# Altium PCB MB1137.PcbDoc (part 2 of 4)
Units mil, origin at the board's own origin, x right, y up, seen from the top; angles counter-clockwise.
Board outline 2760.94 x 5254.68 mil, 6 copper layers (Top Layer, GND, Signal, PWR, GND (Mid2), Bottom Layer), stack 74.545 mil thick; 293 components, 281 nets, 1134 pads, 921 vias.
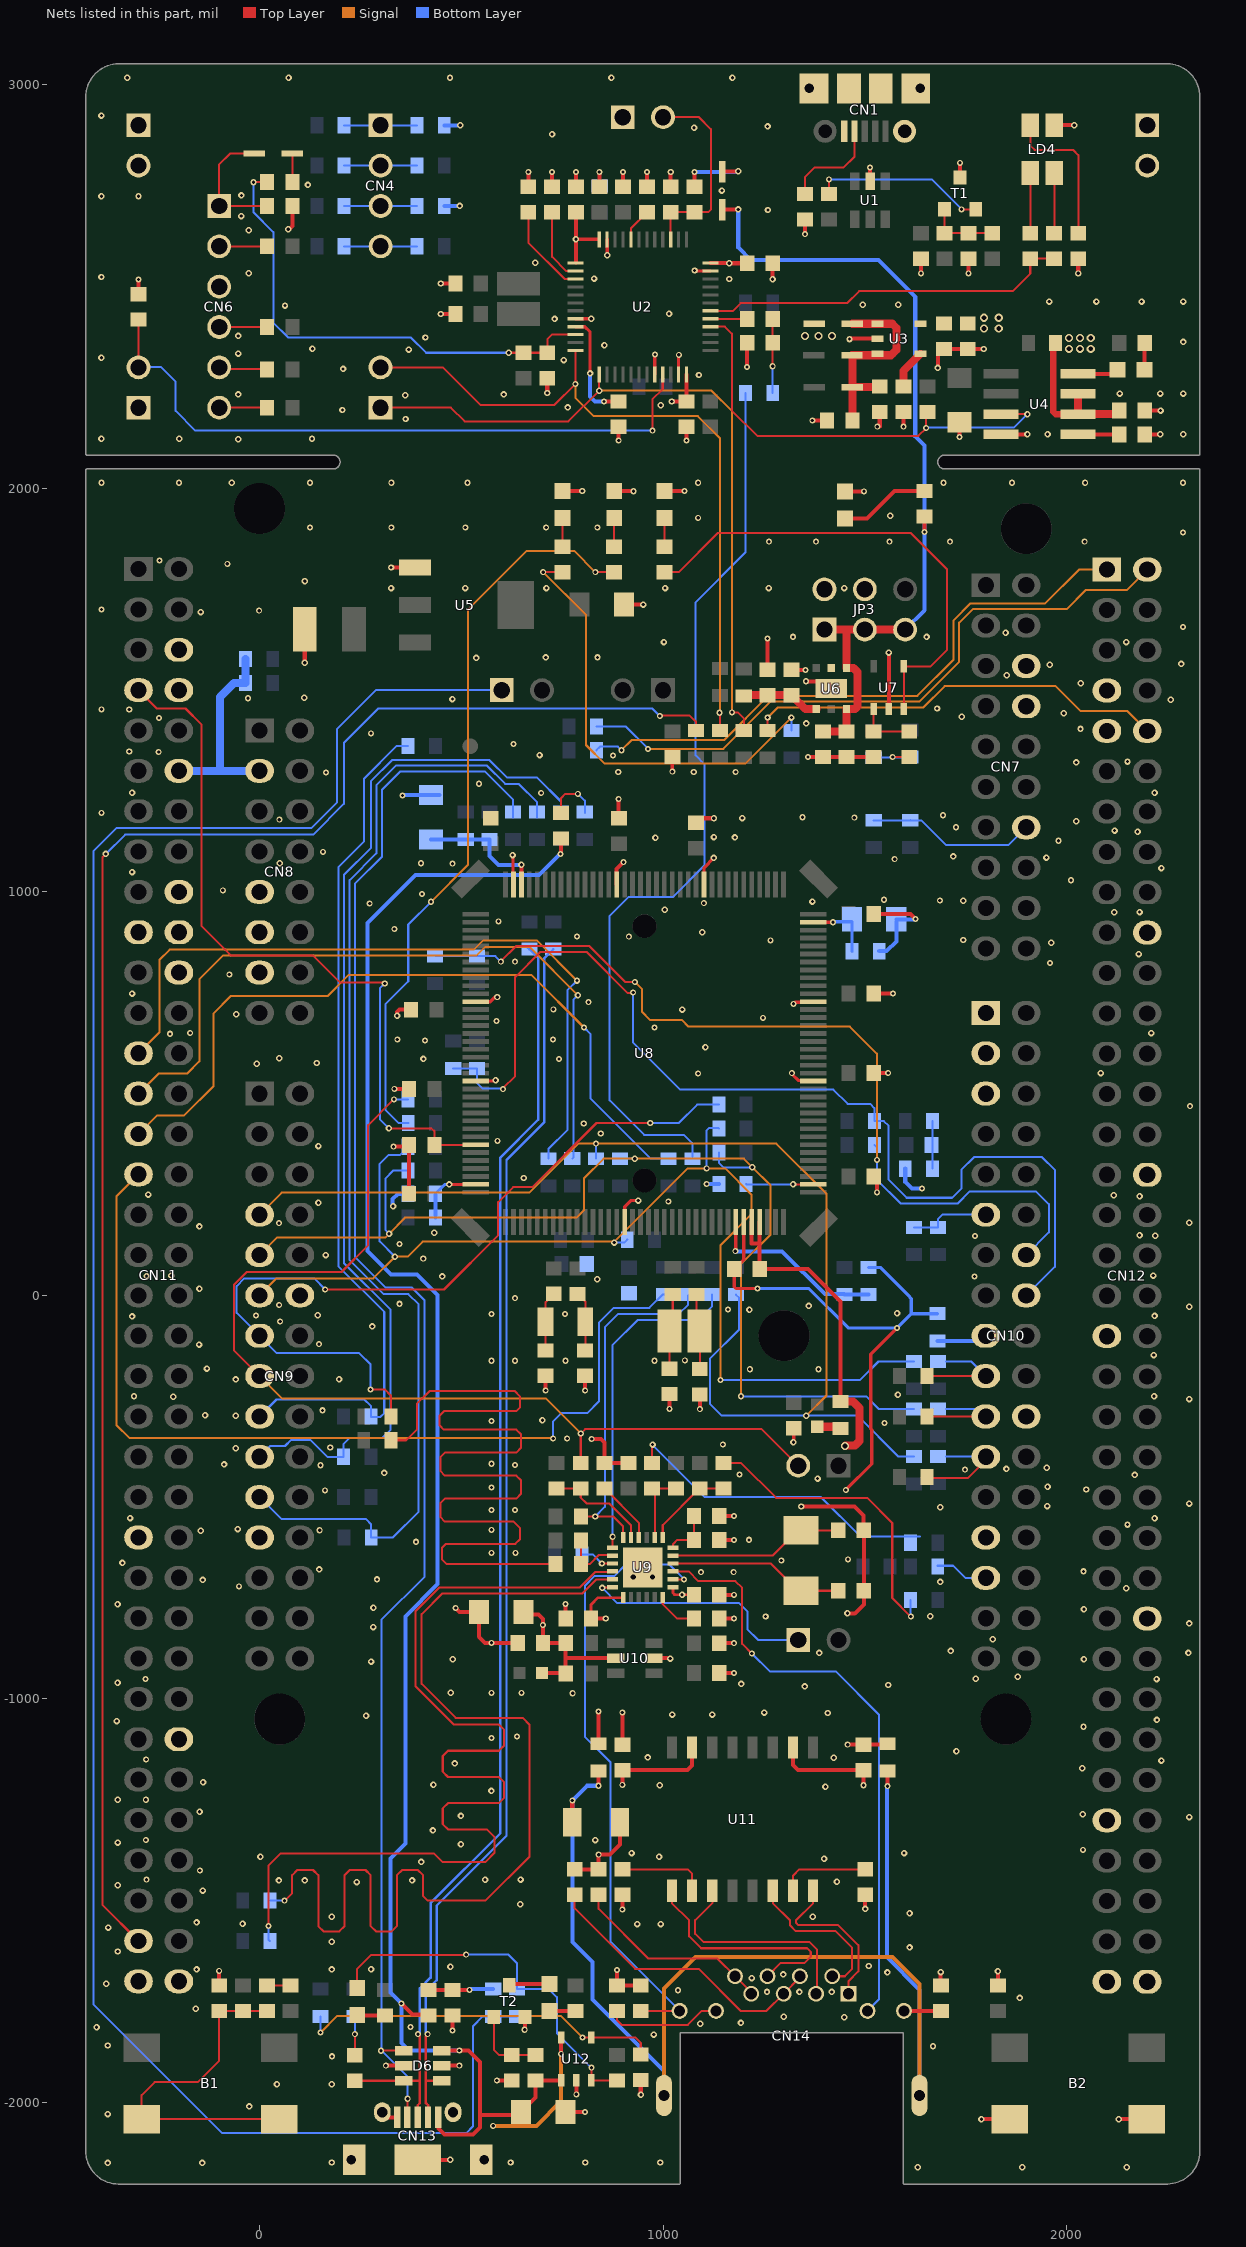
[diagram p6: the nets of this part, all layers, seen from the top]

## Via types
v1: diameter 16, hole 8, Top Layer to Bottom Layer, tented both sides, 464 vias
v2: diameter 15, hole 8, Top Layer to Bottom Layer, tented both sides, 415 vias
v3: diameter 20, hole 12, Top Layer to Bottom Layer, tented both sides, 39 vias
v4: diameter 25.98, hole 12.99, Top Layer to Bottom Layer, tented both sides, 2 vias
v5: diameter 15, hole 8, Top Layer to Bottom Layer, 1 vias

## Nets (pads, with @x,y where several pads share a name; then routed paths per layer and width w, separated by ;. In a path a pad name is that pad's centre, name@x,y a point inside that pad or via, vN(x,y) a via of type N, cw(c..) or ccw(c..) an arc to the next point about the centre after c; other vN are vias at no path point) (continued)
+3V3_ST_LINK: C1.2 C3.2 C8.2 C9.1 C12.2 C13.2 JP1.1 R5.2 R14.2 R18.1 SB102.2 T1.3 U2.1 U2.9 U2.24 U2.36 U2.48 U3.5 | length 878.3
  Top Layer w8: U2.9@782.68,2400.79 806.41,2400.79 819,2388.2 v1(819,2285) ; v1(784,2617.27) 784.06,2617.32 U2.48@841.73,2617.32
  Top Layer w10: R18.1@-300,2481.5 v2(-300,2518) ; U2.1@784,2559.53 v1(784,2617.27) C1.2@784,2684.45 ; R5.2@842,2747.5 v2(842,2784) ; v2(853.5,2215.5) C12.2@890,2215.5 ; v2(1021.5,2215.5) C13.2@1058,2215.5 ; C13.2@1058.27,2215.71 U2.24@1058.27,2282.68 ; U2.36@1117.32,2558.27 1208.24,2558.27 C3.2@1208.5,2558 v1@1170.27,2558 ; T1.3@1736,2770.37 v2(1736,2806.87) ; v2(2029,2533) R14.2@2029,2569.5
  Bottom Layer w10: SB102.2@457.75,2900 v1(497.25,2899.94) ; v1(819,2285) 818.73,2284.73 818.73,2227.76 831,2215.5 v2@852.21,2215.5
  other v1: 1015,2432.9 1495,2455 1583,2455 -27,2532.94 1164,2558 -27,2639.94
  other v3: 1795,2396 1832,2396 1795,2423 1832,2423
+5V: C22.2 C23.1 CN8.9 CN11.18 D2.1 JP3.1 JP3.3 JP3.5 R29.2 U6.1 U6.6 U12.5 | length 2424
  Top Layer w10: v2(747.6,-1879.54) U12.5@747.6,-1838.85 ; D2.1@1147,2690.76 v1@1185.61,2690.76 ; v2(1648,1892) R29.2@1648,1930.5
  Top Layer w20: C22.2@1396,1397.5 C23.1@1455,1397.5 U6.6@1455,1452.22 ; JP3.1@1400,1650 1454,1650 ; U6.6@1454.4,1452.82 1475.82,1452.82 1482,1459 1482,1545 1471.82,1555.18 U6.1@1454.4,1555.18 1454.4,1649.6 1454,1650 ; JP3.5@1600,1650 JP3.3@1500,1650 1454,1650
  Signal w10: v2@579,-2059 580,-2058 685.81,-2058 747.6,-1996.21 v2(747.6,-1879.54)
  Bottom Layer w10: v1(1186.37,2691.51) 1186.37,2596.63 1217,2566 1533.87,2566 1625,2474.87 1625,2129 1648,2106 v2(1648,1892) 1648,1698 JP3.5@1600,1650
  other v2: 579,-2058
AGND: C34.2 CN10.3 CN12.32 SB162.2 SB166.1 U8.31 | length 1362.7
  Top Layer w8: U8.31@1200.06,181.69 1200.06,88.56 C34.2@1176.5,65 1176.5,21.14 1180.53,17.11 1234.14,17.11 v2(1234.25,17) ; v2(1453,-482) 1517.21,-417.79 1517.21,-332.72 1514.7,-330.21 1514.7,-145.9 v2(1580,-80.6)
  Bottom Layer w8: v2(1234.25,17) 1361.59,17 1459.19,-80.6 v2(1580,-80.6) 1615.35,-45.25 ; SB166.1@1509,69.45 1538.55,69.45 1607.2,0.8 1607.2,0.28 1615.35,-7.87 1615.35,-45.25 ; SB162.2@1680,-45.25 1615.35,-45.25
AIN_1: R1.2 R24.2 R25.2 U2.10 | length 1219.8
  Top Layer w5: v1(-15,2759) R1.2@18.5,2759 ; v1(617.6,2336.2) R25.2@654,2336.2 R24.2@713,2336.2 713,2369.89 724.21,2381.1 U2.10@782.68,2381.1
  Bottom Layer w5: v1(-15,2759) -15,2684 34,2635 34,2411 71,2374 375,2374 412.8,2336.2 v1(617.6,2336.2)
AVDD: C34.1 CN7.6 CN10.1 CN12.7 SB12.2 U8.32 U8.33 | length 850.9
  Top Layer w10: U8.32@1219.75,181.69 1219.75,128.39 1239.43,128.39 ; U8.33@1239.43,181.69 1239.43,128.39 ; C34.1@1239.5,62 1239.43,62.07 1239.43,128.39 ; C34.1@1239.5,65 1359.74,65 1440,-15.26 SB12.2@1440,-262.8
  Top Layer w20: SB12.2@1440,-262.8 1470.8,-262.8 1487,-279 1487,-361.1 1476.1,-372 1452,-372 v3(1450.86,-373.14)
BOOT0: CN11.7 R36.1 U8.138 | length 1829.9
  Top Layer w5: CN11.7@-300,1500 -254.5,1454.5 -183.5,1454.5 -144,1415 -144,916.22 -69.81,842.03 132.97,842.03 200,775 310,775 v1(310,773) ; v1(320.57,414) 426,414 433.5,406.5 R36.1@433.5,373 ; R36.1@434,372.5 U8.138@534.57,372.5
  Bottom Layer w5: v1@310,775 v1(310,773) 298,761 298,436.57 v1(320.57,414)
E5V: CN11.6 D3.1 JP3.2
  other v3: 1352,2378 1385.5,2378 1419,2378
EGND: C51.1 CN14.13 CN14.14 SB16.1 SB17.1 | length 3067.5
  Top Layer w10: C51.1@774.94,-1306 774.94,-1252.06 v2(775,-1252) ; v2(840,-1215.25) SB16.1@840,-1178.75 ; v2(1556,-1216.25) SB17.1@1556,-1178.75
  Signal w10: CN14.14@1002.46,-1982.64 1002.46,-1717.54 1079.9,-1640.1 1569.1,-1640.1 1635.54,-1706.54 CN14.13@1635.54,-1982.64
  Bottom Layer w10: v2(840,-1215.25) 811.75,-1215.25 v2(775,-1252) 775,-1602 825,-1652 825,-1745.11 1002.46,-1922.57 CN14.14@1002.46,-1982.64 ; v2(1556,-1216.25) 1554.6,-1217.65 1554.6,-1640.06 1635.54,-1721 CN14.13@1635.54,-1982.64
GND: B2.1 B2.4 C1.1 C2.1 C3.1 C4.1 C5.2 C6.2 C7.2 C8.1 C9.2 C10.1 C11.1 C12.1 C13.1 C14.1 C15.1 C16.2 C17.2 C18.2 C19.1 C20.2 C21.2 C22.1 C23.2 C24.2 C25.2 C26.2 C27.2 C28.2 C29.2 C30.2 C31.2 C32.2 C33.2 C35.2 C36.2 C37.2 C38.2 C39.2 C40.1 C41.2 C42.1 C43.2 C44.1 C45.2 C46.2 C47.1 C48.1 C49.1 C50.1 C53.1 C54.2 C55.2 C56.2 C57.2 C58.2 CN1.5 CN1.6 CN1.7 CN1.8 CN1.9 CN1.10 CN2.1 CN2.2 CN3.1 CN3.2 CN6.3 CN7.8 CN8.11 CN8.13 CN9.12 CN9.23 CN10.5 CN10.17 CN10.22 CN10.27 CN11.8 CN11.19 CN11.20 CN11.22 CN11.49 CN11.60 CN11.71 CN11.72 CN12.9 CN12.20 CN12.39 CN12.54 CN12.63 CN12.71 CN12.72 CN13.5 CN13.6 CN13.7 CN13.8 CN13.9 CN13.10 D6.2 D6.5 JP2.1 LD1.2 LD2.2 LD3.2 LD4.1 LD6.2 R2.2 R3.1 R4.1 R6.1 R7.2 R11.2 R16.1 R24.1 R28.1 R33.2 R36.2 R41.2 R49.2 R58.2 R63.2 R65.2 R66.2 R67.2 R69.1 R72.1 SB16.2 SB17.2 SB106.2 SB107.1 SB129.2 SB152.2 SB153.2 SB155.2 SB162.1 T2.2 U1.2 U2.8 U2.20 U2.23 U2.35 U2.47 U3.2 U4.4 U5.1 U6.0 U6.2 U7.2 U8.16 U8.51 U8.61 U8.83 U8.94 U8.107 U8.120 U8.130 U9.25 U10.2 U12.2 | length 6241.3
  Top Layer w8: U8.130@535.69,531.1 v1@584.73,531.1 ; U8.120@535.69,727.95 572.04,727.95 583.08,739 v2(589,739) ; v1(627,1091.28) 627.98,1090.3 627.98,1019.52 U8.107@629.2,1018.31 ; U2.8@782.68,2420.47 v1(822.18,2420.41) v1(822.18,2420.41) ; v1(861.42,2577.76) U2.47@861.42,2617.32 ; U8.16@904.79,181.69 904.79,219.79 920,235 v1(938.42,235) ; U2.20@979.53,2282.68 v2@979.53,2331.53 ; v2(1023,1298) C21.2@1023,1334.5 C21.2@1030,1327.51 ; U2.23@1038.58,2282.68 v2@1038.58,2330.58 ; v1(1078,2540) 1079.42,2538.58 U2.35@1117.32,2538.58 ; U8.83@1101.64,1018.31 1101.64,1060.14 v1(1125.75,1084.25) ; v2(1319,550.79) 1319,548.74 1334.86,532.88 1370.53,532.88 U8.51@1372.31,531.1 ; v1(1323,-364) 1324,-363 C39.2@1324,-328.9 ; v2(1323.54,722.64) 1327.41,726.5 U8.61@1370.85,726.5
  Top Layer w10: R58.2@-100,-1710.5 v2(-100,-1674) ; v1@73,2642 81.5,2650.5 R2.2@81.5,2700 ; v1(111.98,1567.98) C17.2@111.98,1651 ; CN13.6@304.4,-2024.2 317.2,-2037 CN13.5@340.82,-2037 ; v2@314,-1909 D6.2@356.76,-1909 ; v1@324,1804 v1(326,1804) U5.1@385,1804 ; v2(331.75,368.5) R36.2@368.25,368.5 ; v2(334,512) C30.2@370.5,512 ; v1(340.82,693) 340.82,701.82 347,708 C28.2@375.5,708 ; C33.2@370.5,252 R36.2@370.5,373 ; CN13.8@392,-2142.31 v1(472.32,-2142.31) ; v2(449,2432) C6.2@485.5,2432 ; v2(449,2508) C5.2@485.5,2508 ; D6.5@451.24,-1909 v2@494,-1909 ; v2(478,-1822) R63.2@478,-1784.5 ; v2(486,-775) 496,-785 C46.2@544,-785 544,-846 559,-861 v2(575,-861) C48.1@639.5,-861 ; v2(588,-1945.55) 588.05,-1945.5 R69.1@625,-1945.5 ; v2(657,-1820) 657.59,-1819.41 T2.2@657.59,-1788.37 ; R3.1@666,2747.5 v2(666,2784) ; v2(709,-236) C35.2@709,-199.5 ; v2(713,2236.7) R24.1@713,2273.2 ; R4.1@725,2747.5 v2(725,2784) ; LD3.2@752.75,1993.46 v2(799.75,1993.43) ; C54.2@758,-2024 v2(806.36,-2024) ; C47.1@758.5,-801 v2(758.5,-764.5) ; C1.1@784,2747.5 v2(784,2784) ; v2(785,-1980) U12.2@785,-1945.15 ; v2(807,-236) C36.2@807,-199.5 ; v2(823,-356) 846,-356 855,-365 R41.2@855,-415.5 C40.1@914,-415.5 ; SB16.2@840,-1111.25 v2(840,-1031.25) ; LD2.2@879.76,1993 v2@926.73,1993 ; U8.94@885.1,1018.31 885.1,1056.69 v2(902,1073.58) ; v2(886,-1672) R65.2@886,-1710.5 R66.2@944.68,-1710.5 ; C25.2@890,1185 v2(890,1230) ; v2(890,2119) C12.1@890,2152.5 ; C49.1@899,-1113.5 v2(899,-1033.5) ; C2.1@901,2747.5 v2(901,2784) ; C18.2@903,1712 v1(951,1712) ; R72.1@944.68,-1944.5 944.68,-1980.68 v1(945,-1981) ; R6.1@960,2747.5 v2(960,2784) ; U10.2@977.56,-899 1018.06,-899 1018,-899.06 v1(1018,-900) ; LD1.2@1006,1993.47 v2@1052.97,1993.47 ; v2(1016,-281) C37.2@1016,-244.5 ; R7.2@1019,2747.5 v2(1019,2784) ; v2(1058,2119) C13.1@1058,2152.5 ; C26.2@1082,1182.5 v2(1125.75,1182.5) ; v2(1091,-282) C38.2@1091,-245.5 ; R49.2@1139.5,-801 v2(1176,-801) ; C44.1@1139.5,-742 v2(1176,-742) ; C42.1@1139.5,-606 v2(1176,-606) ; C41.2@1139.5,-547 v2(1176,-547) ; v2(1208,2301) 1208.5,2301.5 C7.2@1208.5,2361 ; C19.1@1259,1550.5 v2(1259,1628.07) ; v1(1271.5,2518.5) C3.1@1271.5,2558 ; C20.2@1318,1550.5 v2@1354.5,1550.5 ; v1(1342.7,-523.21) 1474.51,-523.21 1497,-545.7 1497,-581.5 C43.2@1497.5,-582 ; v2(1352,2630) R11.2@1352,2666.5 ; v2(1354.5,1522) U6.0@1391,1522 ; v2(1359.5,1334.5) C22.1@1396,1334.5 R33.2@1522,1334.5 ; v2(1370,2168) C10.1@1406.5,2168 ; LD6.2@1451.04,1992.79 v2(1498.04,1992.77) ; v2(1457.5,-1113.5) C50.1@1497,-1113.5 SB17.2@1553.75,-1113.5 ; v1@1459.55,-788 1475.1,-788 1497.5,-765.6 C45.2@1497.5,-732 C43.2@1497.5,-582 ; v1@1462,2371 U3.2@1531.85,2371 ; C43.2@1497,-582.5 C43.2@1497.5,-582 ; U1.2@1513,2761.24 v2(1513,2795) ; C31.2@1522.5,551 v2(1558,551) ; C29.2@1522.5,748 v2(1570,748) ; C27.2@1522.5,945 1613.75,945 v2(1625.75,933) ; C32.2@1523.5,296 C32.2@1522.5,295 1530,287.5 v2(1530,255.51) ; v2(1531,2153) 1537,2153 C14.1@1537,2189.5 ; U7.2@1559.5,1452.85 v1(1559.5,1593) ; v2(1596,2153) C15.1@1596,2189.5 ; v2(1639,2533) C4.1@1639,2569.5 ; v1(1681,2298.5) C8.1@1681,2338 ; R67.2@1688,-1710.5 v1(1688,-1677) ; C8.1@1696,2345.5 C9.2@1755,2345.5 v1(1794.5,2345.5) ; v2(1735,2127.5) C16.2@1735,2164 ; v2(1756.7,2533) R16.1@1756.7,2569.5 ; v1(1788.87,-2041.58) B2.1@1858.72,-2041.58 ; C53.1@1830,-1710.5 v1(1830,-1675) ; U4.4@1837.53,2134 v1(1903,2134) ; LD4.1@1969.53,2900.06 v1(2018.94,2900.06) ; v1(2129.42,-2041.58) B2.4@2199.28,-2041.58 ; R28.1@2193.5,2134 v1(2232,2134) ; C11.1@2193.5,2193 v1(2233,2193)
  Bottom Layer w10: v1(331,221) 330,221 330,239.36 342.46,251.83 SB153.2@368.19,251.83 ; v2(354,1239) 355,1240 C55.2@425,1240 C55.2@446,1240 ; SB106.2@457.75,2700 v1(496,2700) ; v2(1108,276.3) 1108.3,276 SB155.2@1138.25,276 ; SB129.2@1535.75,853 1554.3,853 1578.5,877.2 C56.2@1578.5,926 ; C56.2@1578,932 1624.75,932 v2(1625.75,933) ; SB152.2@1600.25,314 1600.25,280.75 1616.46,264.54 1641.54,264.54 v2(1642,265) ; SB162.1@1680,-112.75 1787.25,-112.75 CN10.17@1800,-100
  other v1: 1631.03,-2161 1890,-2161 2148.97,-2161 -376.5,-2150 -142.25,-2150 179,-2149 622,-2149 807.21,-2149 993,-2149 -376.5,-2029 -25.75,-2010.04 43,-1955.06 179,-1955.06 179.47,-1886 1669,-1861 -376.5,-1859 977,-1832 -404,-1814 1092,-1805 1193,-1803 1448.82,-1789 1299.1,-1788 -157.97,-1768 1884,-1741 1257.62,-1726.17 1337.94,-1726.17 1418.25,-1726.17 1037,-1722 -380,-1706 1219.75,-1691.86 1297.78,-1682.87 1556,-1678 -156,-1670.5 179,-1670.5 276.5,-1670 473,-1664 1510,-1662 -351.37,-1626 1610.94,-1615.79 179,-1602 -375,-1566.79 936,-1558 994,-1558 -42,-1557 -156,-1554 179,-1540 1371,-1540 1611,-1531 646,-1509 -141,-1475 -351.37,-1462 241,-1454 1431,-1453 48,-1450 112,-1450 378,-1450 559,-1448 647,-1447.71 400.5,-1404 1399,-1396 2,-1391 990,-1391 922,-1382 1597.26,-1382 499,-1360 -351.37,-1356 832,-1350 429.52,-1326 2304,-1292.86 499,-1290 2040,-1286 -148.74,-1279.7 -351.37,-1250 574.5,-1228 1402.35,-1218 991.76,-1214 430.77,-1212.62 -140,-1206.5 2039,-1172 484,-1160 2235,-1153 1423,-1146 962,-1145 1727,-1130 2042,-1069 -354,-1055 2224,-1052 264,-1042 1022.9,-1039 1122,-1039 1408,-1035 1251,-1034 474,-984.5 1351,-969 1558,-965.53 1194,-963 -352,-960 2223,-951 1775,-950.06 1879,-945 276.5,-907.39 479,-902 2043,-902 1387,-886 2302,-886 1713,-881 1817,-852 282,-822 2304,-813 1254,-795.84 1662,-795.34 1457,-788 2043,-778 282.11,-774 -352,-765.17 2147.65,-726 1687,-710 -141,-705 291,-703.84 2042.03,-684 148.13,-679 -340,-663 387.74,-611 1213,-606 -146,-583 -54,-579 2151,-568 -320.97,-552 2218.02,-552.5 1687,-525 1952,-522 2304,-515.94 2049,-481 1953,-474 1383,-454 2169,-445 309,-440 1851,-430 1951,-427 151,-421 -88,-419 -59,-379 175,-377 701,-309.5 -59,-298 -135,-297 156,-285 2304,-256.97 -214,-251 2217,-250 1582,-246 -59,-208.17 197,-208 -130.5,-181.5 2216,-148 -150,-122 279.5,-77 -316,-52 2218,-51 144,-49 1580,-44 1214,-35.76 2304,-28 1361,-26 346.79,-21 -149,16.3 837,40 453,47 -280,48 -219,49 2215,49.25 163.77,100 2220.03,148 2181,149 433,155.5 -149,171 2304,180 146,229.8 2181,246 2117,248 -276,250 655,291 146,370 585,533 2085,551 -7,574 142,576 406,586 48.5,588 1104.94,615 -222,648 2210,650 -58,697 1047.34,708.45 -316,748 2179,846 1097,900 2118,949.45 2181,950 1004,956.01 1370.05,976.02 1743.93,978 2011,1029 -316,1049.07 2235,1059 1950,1085 1719,1088 1980,1127 981,1134 1178,1135 1126,1136 2176,1149 2119,1152 1726,1160 2024,1175 1196,1183 -316,1246 2218,1246 2024,1321 2151,1323 693.93,1339.01 -323,1348 2034.5,1404 1355,1417.57 1740,1434 1993,1443 -323,1452 1679,1454.5 2258,1476 478,1478 -28.66,1480 111,1481 2035,1517.25 1852,1537 1958.25,1563 2284,1565 537,1580 709,1581 837.5,1581 1002,1619 2148,1619 1322,1632 1653,1632 1849,1642.49 -146,1693.35 326,1753 509.5,1753 710.81,1753 1005,1753 1262,1753 1449,1753 112.48,1770 1563.22,1932 -53,2122 -392,2123 -199,2123 1953,2134 2289,2134 362,2172 205.24,2194.26 763.56,2200.71 994.54,2206 361,2231 -53,2232.94 605,2232.94 2132,2235 2232,2235 2289,2235 1089,2281 207,2296 754,2318 -392,2323.94 -53,2334 370,2344 131,2346 854.71,2355 2289,2363 1462,2370 411,2374 -53,2377.94 731,2420 63,2453 1957.34,2463 2074,2463 2186,2463 2289,2463 1164,2519 829,2520 -392,2523.94 683,2559 71,2642 -45.56,2675 1260,2690 -392,2723.94 -300,2723.94 -45.07,2726 1146,2738 119.84,2752 725,2877.94 1077,2894 1259,2897 -392,2924 -328,3018 72,3018 472,3018 872,3018 1172,3018
  other v2: 313,-1909 495,-1909 374,-1813 -280,-1448 -148,-1425 2041,-1374 -282,-1350 -282,-1250 -281,-1150 574.5,-1097 638,-1093.17 776,-986 575,-985 649,-985 -283,-951 -51,-721 1094,-686 1175,-686 1293,-657 1458,-654 575,-638 634,-638 149,-582 575,-581 575,-532 633,-532 162,-483 575,-476.02 1189.2,-444 1748,-432 633,-420 575,-417.24 1148,-369.63 762.42,-354.5 1549,-316 575,-311 -311,-250 1215,-183 1385,-183 575,-162 633,-162 758,-162 979,-162 1054,-161 147,-121 51,-65 -9,-49.94 575,-46 757,-46 1161,-35 48.5,-24 633,-7 1772,47 405.67,91 347,127.43 1773,147 48,179 1013,232.5 590,383 845.5,401 803.45,426 2306,469 1087,549.94 742,585.69 410,632 341.32,634 727,634 -172,650 979,664 587,680 1248,688 728,709 815,726.64 -75,795 1959.06,824 633,827 1962,874 1266.25,880 1744,881 915.13,889 787,889.43 334,908 592,927 272.84,971 1101,972 1685.99,978.54 1547.5,980.5 402.69,995 -91,1004 478,1070 50,1071 400,1071 1574,1081 157,1099.36 49,1179 1473.99,1184 1345.31,1185 1693.59,1190 -391.5,1196 698,1245 544,1268 164.5,1296 889,1297 1076,1297 1180,1297 876,1338 -250,1347 629,1366.25 276,1393 -249,1431 -391.5,1452.5 1353,1550 2288.5,1656.82 -1,1697 -391.5,1700 111.98,1770.5 -80,1813 -248,1821 1262.5,1868 1379,1868 1561,1868 1711,1868 2045,1868 2288.5,1891 125,1903 326.5,1903 510,1903 710.31,1903 837,1903 1087,1927 926.76,1992.97 1053,1993.44 -391.5,2014 -199.5,2014 -69,2014 125,2014 326.5,2014 515.21,2014 1087,2014 1695,2014 1864.59,2014 2046.18,2014 2288.5,2014 130,2123 1039,2331 980,2332
  other v4: 926.38,-697.94 973.62,-697.94
IOREF: CN8.3 CN11.12 SB113.2 SB114.2 | length 520.2
  Bottom Layer w20: CN11.12@-200,1300 -97,1300 ; SB113.2@-34.75,1577 SB114.2@-34.75,1518 -63,1518 -98,1483 -98,1301 -97,1300 ; CN8.3@0,1300 -97,1300
LED_STLINK: R13.1 R17.1 U2.30 | length 927.5
  Top Layer w5: U2.30@1117.32,2440.16 1117.98,2439.5 1172.92,2439.5 1192.42,2459 1455.91,2459 1485.91,2489 1866.5,2489 1910,2532.5 R13.1@1910,2569.5 R17.1@1969,2569.5
MCO: SB112.2 SB149.1 | length 2262.1
  Bottom Layer w5: SB149.1@1072.7,338.75 1072.7,377.09 1051.79,398 953,398 867.73,483.27 867.73,940.73 914,987 1024.1,987 1102.45,1065.35 1102.45,1316.21 1080.49,1338.17 1080.49,1717.49 1204.25,1841.25 SB112.2@1204.25,2236
NetB1_1: B1.1 B1.4 C52.2 R58.1 R59.1 | length 869
  Top Layer w5: C52.2@18,-1773.5 R59.1@-41,-1773.5 R58.1@-100,-1773.5 -100,-1897 -153,-1950 -260,-1950 -292.28,-1982.28 B1.1@-292.28,-2041.58 B1.4@48.28,-2041.58
NetC7_1: C7.1 R20.2 SB112.1 | length 184.1
  Top Layer w5: R20.2@1271.5,2420 C7.1@1271.5,2361 1271.5,2302.99 v2(1271.75,2302.73)
  Bottom Layer w5: SB112.1@1271.75,2236 v2(1271.75,2302.73)
NetC10_2: C10.2 C14.2 D3.2 D4.2 D5.2 U3.1 U3.3 | length 510.4
  Top Layer w20: D4.2@1468.24,2330 1565,2330 1568.6,2333.6 1578,2343 1578,2398 1568,2408 D3.2@1469.24,2408 ; D4.2@1469.24,2329 D5.2@1469.24,2251 ; C10.2@1469.5,2168 1469.24,2168.25 D5.2@1469.24,2251 ; C14.2@1535.5,2251 D5.2@1469.24,2251
NetC11_2: C11.2 JP3.4 SB1.2 U4.6 U4.7 | length 388.2
  Top Layer w16: SB1.2@1972.75,2360 1967.17,2354.42 1967.17,2189.83 1973,2184 U4.6@2028.47,2184
  Top Layer w20: U4.7@2028.47,2234 U4.6@2028.47,2184 C11.2@2130.5,2184
  other v3: 2006,2346 2033,2346 2060,2346 2006,2373 2033,2373 2060,2373
NetC15_2: C15.2 U3.4 | length 98.6
  Top Layer w20: C15.2@1596,2252.5 1596,2291.45 U3.4@1638.15,2333.6
NetC19_2: C19.2 C20.1 SB3.1 U6.4 | length 194.9
  Top Layer w20: SB3.1@1200,1485.25 1202.25,1487.5 C19.2@1259,1487.5 C20.1@1318,1487.5 1352.69,1452.82 U6.4@1379.6,1452.82
NetC35_1: C35.1 R37.1 X2.2 | length 148.4
  Top Layer w5: C35.1@708.79,-136.29 X2.2@708.79,-65 708.79,-16.46 R37.1@729,3.75
NetC36_1: C36.1 R38.1 X2.1 | length 147.8
  Top Layer w5: R38.1@788,3.5 807.21,-15.71 X2.1@807.21,-65 C36.1@807.21,-136.29
NetC37_1: C37.1 SB8.1 X3.2 | length 186.8
  Top Layer w5: X3.2@1015.6,-88 1024,-79.6 SB8.1@1024,2.25 ; C37.1@1016,-181.5 X3.2@1016,-88.4
NetC38_1: C38.1 SB9.1 X3.1 | length 187.2
  Top Layer w5: SB9.1@1083,2.25 1083,-80.6 X3.1@1090.4,-88 ; C38.1@1091,-182.5 X3.1@1091,-88.6
NetC41_1: C41.1 C42.2 U9.6 | length 123.8
  Top Layer w5: U9.6@1024.8,-625.1 1024.8,-616.2 1035,-606 C42.2@1076.5,-606 C41.1@1076.5,-547
NetC43_1: C43.1 U9.5 X4.1 | length 426.7
  Top Layer w5: U9.5@1024.8,-644.79 1271.21,-644.79 1333.8,-582.2 X4.1@1342,-582.2 1425.31,-582.2 C43.1@1425.5,-582
NetC44_2: C44.2 C46.1 C47.2 C48.2 C49.2 C50.2 L2.1 R50.2 R51.2 R52.2 R53.2 U9.1 U9.19 U10.5 U11.2 U11.7 | length 1232.3
  Top Layer w7: C47.2@821.5,-801 821.5,-766.5 838.88,-749.12 U9.19@900.79,-749.12 ; U9.1@1024.8,-723.53 1024.8,-737.8 1029,-742 v1(1047,-742) C44.2@1076.5,-742
  Top Layer w10: C46.1@654,-791 691,-791 702.5,-802.5 C48.2@702.5,-861 R52.2@758.5,-861 758.5,-898 ; L2.1@699.5,-936 R53.2@757.5,-936 ; R53.2@758.5,-937 758.5,-898 ; C47.2@821.5,-801 v2(858,-801) ; U10.5@883.07,-899 759.5,-899 758.5,-898 ; v2(899,-1213) C49.2@899,-1176.5 ; C49.2@912,-1176.5 1060.98,-1176.5 1072,-1165.47 U11.7@1072,-1120.44 ; R51.2@1139.5,-936 v2(1176,-936) ; R50.2@1139.5,-862 v2(1176,-862) ; U11.2@1322,-1120.44 1322,-1164 1334.5,-1176.5 C50.2@1497,-1176.5 v2(1497,-1214)
  other v2: 702,-817
NetC45_1: C45.1 U9.4 X4.2 | length 451.9
  Top Layer w5: U9.4@1024.8,-664.47 1267.21,-664.47 1334.54,-731.8 X4.2@1342,-731.8 ; X4.2@1324.8,-731.8 1333,-731.8 1333.2,-732 C45.1@1431.55,-732
NetC51_2: C51.2 R54.1 R55.1 R56.1 R57.1 | length 285.4
  Top Layer w10: R54.1@781,-1422.5 R55.1@840.33,-1422.5 v2(840.33,-1386) 868.07,-1386 893.06,-1361.02 C51.2@893.06,-1306 ; v2(899,-1522) R56.1@899,-1485.5 ; v1(1501,-1520.5) R57.1@1501,-1485.5
NetC52_1: C52.1 R60.2 | length 59
  Top Layer w5: C52.1@18,-1710.5 R60.2@77,-1710.5
NetC54_1: C54.1 CN13.1 D6.6 R35.1 R62.1 R68.1 U12.1 | length 4440.2
  Top Layer w10: v2(351.25,-1755) 378.91,-1782.66 417.16,-1782.66 R62.1@419,-1784.5 ; CN13.1@443.18,-2037 443.18,-2064.18 458.4,-2079.4 529,-2079.4 546,-2062.4 546,-2031 ; D6.6@451.24,-1871.6 v2(495,-1871.6) 517.6,-1871.6 546,-1900 546,-2031 ; v2(746.14,1094) 747,1094.86 R35.1@747,1132.5 ; U12.1@747.6,-1945.15 747.25,-1945.5 R68.1@684,-1945.5 684,-1988 C54.1@648,-2024 641,-2031 546,-2031
  Bottom Layer w10: v2(495,-1871.6) 369.85,-1871.6 351.25,-1853 v2(351.25,-1755) 324.1,-1727.85 324.1,-1395.9 361.5,-1358.5 361.5,-795.27 441.5,-715.27 441.5,0.75 390.08,52.17 325.46,52.17 267.4,110.23 267.4,923.4 386,1042 692.02,1042 744.02,1094 v2(746.14,1094)
NetC55_1: C55.1 SB123.1 SB124.1 U8.106 | length 323.1
  Top Layer w10: U8.106@648.88,1018.31 v1(648.88,1067.12)
  Bottom Layer w10: C55.1@425,1130 510.75,1130 SB123.1@511,1130.25 SB124.1@570,1130.25 570,1089 591.88,1067.12 v1(648.88,1067.12)
NetC56_1: C56.1 SB129.1 U8.71 | length 169.8
  Top Layer w8: U8.71@1372.31,924.8 v2(1420.9,924.8)
  Bottom Layer w8: v2(1420.9,924.8) 1422.09,926 1468.5,926 1468.5,853.25 SB129.1@1468.25,853
NetCN1_4: CN1.4 R11.1 | length 248.4
  Top Layer w5: R11.1@1352,2729.5 1352,2771.94 1375.06,2795 1447,2795 1474.41,2822.41 CN1.4@1474.41,2885
NetCN4_1: CN4.1 SB101.2 SB102.1 | length 180.5
  Bottom Layer w5: SB101.2@209.75,2900 CN4.1@300,2900 SB102.1@390.25,2900
NetCN4_2: CN4.2 SB103.2 SB104.1 | length 180.5
  Bottom Layer w5: SB103.2@209.75,2800 SB104.1@390.25,2800
NetCN4_3: CN4.3 SB105.2 SB106.1 | length 180.5
  Bottom Layer w5: SB105.2@209.75,2700 CN4.3@300,2700 SB106.1@390.25,2700
NetCN4_4: CN4.4 SB108.2 SB109.1 | length 180.5
  Bottom Layer w5: SB108.2@209.75,2600 CN4.4@300,2600 SB109.1@390.25,2600
NetCN5_1: CN5.1 SB5.1 U2.13 | length 1790
  Top Layer w5: CN5.1@299.69,2200 474,2200 508,2166 765.46,2166 v1(841.73,2242.27) U2.13@841.73,2282.68 ; v2(1171,1445) 1185,1445 1200,1430 SB5.1@1200,1400
  Signal w5: v1(841.73,2242.27) 1120,2242.27 1171,2191.27 v2(1171,1445)
NetCN5_2: CN5.2 SB6.1 U2.12 | length 1784.1
  Top Layer w5: CN5.2@299.69,2300 454,2300 547,2207 731,2207 v2(782.5,2258.5) 782.68,2258.68 U2.12@782.68,2341.73 ; SB6.1@1141,1400 v2@1141,1443.93
  Signal w5: v2(782.5,2258.5) 782.5,2224.5 828,2179 1086,2179 1141.07,2123.93 v2@1141.07,1444
  other v2: 1140,1444
NetCN6_1: CN6.1 D1.1 R2.1 | length 320.4
  Top Layer w5: D1.1@-12.24,2829.94 -73,2829.94 -100,2802.94 CN6.1@-100,2700 R2.1@18.5,2700
NetCN6_2: CN6.2 R10.1 | length 117
  Top Layer w5: CN6.2@-100,2600 R10.1@17,2600
NetCN6_4: CN6.4 R19.1 | length 116.4
  Top Layer w5: CN6.4@-100,2400 15,2400 R19.1@16,2401
NetCN6_5: CN6.5 R22.1 | length 118.4
  Top Layer w5: CN6.5@-100,2300 -95.5,2295.44 R22.1@16.56,2295.44
NetCN6_6: CN6.6 R23.1 | length 120
  Top Layer w5: CN6.6@-100,2200 19.94,2199.94 R23.1@20,2200
NetCN7_14: CN7.14 SB121.1 SB122.1 | length 421.8
  Bottom Layer w5: SB121.1@1522,1177.5 SB122.1@1612.75,1177.5 ; SB122.1@1613.15,1177.9 SB122.1@1612.75,1177.5 ; CN7.14@1900,1160 1856.51,1116.51 1700.72,1116.51 1639.72,1177.5 SB122.1@1612.75,1177.5
NetCN9_7: CN9.7 SB146.1 SB165.1 SB174.1 | length 3002.9
  Signal w5: CN9.7@0,200 54.5,254.5 668.5,254.5 790,376 v2(834,376) 1281,376 1405,252 1405,-248 v1(1355,-298)
  Bottom Layer w5: SB146.1@834,338.75 834,374.94 835.06,376 v2(834,376) ; SB165.1@1180.53,2.06 1188.49,-5.9 1188.49,-84.53 1116,-157.02 1116,-268.53 1145.47,-298 v1(1355,-298) 1482,-298 1583.5,-399.5 SB174.1@1622,-399.5
NetCN9_9: CN9.9 SB143.1 SB147.1 SB150.1 SB171.1 | length 2788.9
  Signal w5: CN9.9@0,100 42.97,142.97 310.97,142.97 v1(321,153) 361,193 786,193 804,211 804,290 852.75,338.75 v1(929.75,338.75) 1199.99,338.75 v1(1221.25,317.49) 1266.25,272.49 1266.25,150.61 1193,77.36 v2(1193,-250)
  Bottom Layer w5: v1(321,153) 311.6,162.4 311.6,289.6 331.5,309.5 SB143.1@368.25,309.5 ; SB147.1@893,338.75 v1(929.75,338.75) ; SB150.1@1138.25,354 1138.25,328.5 1149.26,317.49 v1(1221.25,317.49) ; v2(1193,-250) 1503.2,-250 1534.7,-281.5 SB171.1@1622,-281.5
NetCN9_11: CN9.11 SB138.1 SB140.1 SB157.1 SB167.1 | length 2863.1
  Signal w5: CN9.11@0,0 42.03,42.03 281.78,42.03 v1(335.56,95.81) 366.81,95.81 404,133 879,133 1061,315 v2(1108,315) 1154,315 1219,250 1219,200.63 1142.1,123.73 v2(1142.1,-209.8)
  Bottom Layer w5: v1(335.56,95.81) 297.7,133.67 297.7,325.95 320.25,348.5 348.25,348.5 SB138.1@368.25,368.5 ; v1(879,131) 904.25,131 SB157.1@911.25,138 ; v2(1108,315) 1108,409 1114,415 1137.25,415 SB140.1@1138.25,414 ; v2(1142.1,-209.8) 1487.95,-209.8 1534,-163.75 SB167.1@1621.75,-163.75
NetCN9_13: CN9.13 SB11.1 SB137.1 | length 2074
  Top Layer w5: v2(162.7,14.7) 457.06,14.7 591.11,148.75 591.11,231.11 628.5,268.5 676.3,268.5 835.06,427.26 v1(968,427.26) ; v2(275,-233) 310,-233 325.75,-248.75 SB11.1@325.75,-299.97
  Bottom Layer w5: v2(162.7,14.7) 135.37,42.03 -37.97,42.03 -57,23 -57,-43 CN9.13@0,-100 42.97,-142.97 246.97,-142.97 275,-171 v2(275,-233) ; v1(968,427.26) 1039,427.26 1084.74,473 SB137.1@1138.25,473
NetCN9_15: CN9.15 JP6.2 R40.2 SB136.1 | length 2558.3
  Top Layer w5: CN9.15@0,-200 -63,-137 -63,27 -32.03,57.97 202.97,57.97 269.13,124.13 269.13,422.08 v2(333,485.95) ; R40.2@796.01,-415.5 v2(796.01,-342.01) 806.72,-331.3 1244.3,-331.3 JP6.2@1335,-422
  Signal w5: CN9.15@0,-200 56,-256 710,-256 v2(796.01,-342.01)
  Bottom Layer w5: v2(333,485.95) v2(333,485.95) SB136.1@368.25,486
NetCN9_17: CN9.17 SB115.1 SB169.1 | length 2152.3
  Bottom Layer w5: CN9.17@0,-300 42.03,-257.97 117.41,-257.97 ; 117.44,-258 259.84,-258 275.75,-273.91 SB169.1@275.75,-300 276.75,-301 299.69,-301 309,-291.69 309,-40.97 195.4,72.63 195.4,1061.4 259,1125 259,1281 340,1362 SB115.1@368.25,1362
NetCN9_19: CN9.19 SB128.1 SB170.1 | length 2663.5
  Bottom Layer w5: CN9.19@0,-400 26.79,-373.21 63,-373.21 78.24,-357.97 126,-357.97 168.03,-400 SB170.1@208.25,-400 208.25,-367.75 223.18,-352.82 304.68,-352.82 325,-332.5 325,-35.76 209.3,79.94 209.3,1042.3 275.7,1108.7 275.7,1274.17 328.43,1326.9 569.42,1326.9 613.32,1283 688,1283 747,1224 SB128.1@747,1197.75 SB128.1@747,1185
NetCN9_21: CN9.21 SB126.1 SB176.1 | length 2908.7
  Bottom Layer w5: CN9.21@0,-500 54,-554 263,-554 276.75,-567.75 SB176.1@276.75,-600 330,-600 394,-536 394,-22 369,3 307.45,3 223.2,87.25 223.2,1029.2 289.6,1095.6 289.6,1264.6 338,1313 563.66,1313 608.66,1268 641.73,1268 688,1221.73 SB126.1@688,1197.75 SB126.1@688,1185
NetCN10_11: CN10.11 SB158.2 SB159.2 | length 202.8
  Bottom Layer w5: SB158.2@1622,168.75 SB159.2@1681,168.75 1681,189 1691.99,199.99 CN10.11@1800,200
NetCN10_14: CN10.14 SB130.2 SB131.2 SB151.2 | length 2238.3
  Top Layer w5: v2(598,827) 598,827.69 636.31,866 816.73,866 905.73,777 v2(930,777)
  Signal w5: v2(930,777) 948,759 948,702.27 967.37,682.9 985.42,682.9 ; 985.52,683 985.42,682.9 ; v2(1530,336) 1530,599 1463,666 1063,666 1046.1,682.9 985.42,682.9
  Bottom Layer w5: SB130.2@435,840.75 SB131.2@539,840.75 584.25,840.75 v2(598,827) ; SB151.2@1523.75,373 1530,366.75 v2(1530,336) 1530,286.97 1589.18,227.79 1729.82,227.79 1760,257.97 1924.03,257.97 1956,226 1956,156 CN10.14@1900,100
NetCN10_16: CN10.16 SB134.2 SB135.2 SB141.2 | length 2666.2
  Top Layer w5: v2(603,511) 603,513 633.5,543.5 633.5,788.5 696,851 810.52,851 912.52,749 925,749 926,750 v2(926,751)
  Bottom Layer w5: SB134.2@480,562.5 SB135.2@539,562.5 539,526 552.77,512.23 601.77,512.23 v2(603,511) ; v2(926,751) 926,626.47 1042.47,510 1422.1,510 1457.5,474.6 1513.15,474.6 1523.75,464 SB141.2@1523.75,432 1547,432 1558.97,420.03 1558.97,286.69 1603.66,242 1716.49,242 1739.03,264.54 1739.03,311 1771,342.97 1939.03,342.97 1971,311 1971,71 CN10.16@1900,0
NetCN10_19: CN10.19 SB10.2 SB168.2 | length 260.3
  Top Layer w5: SB10.2@1653.75,-200 CN10.19@1800,-200
  Bottom Layer w5: 1701,-163.75 1763.75,-163.75 CN10.19@1800,-200
NetCN10_21: CN10.21 SB14.2 SB172.2 | length 252.9
  Top Layer w5: SB14.2@1653.75,-300 CN10.21@1800,-300
  Bottom Layer w5: 1701,-281.5 1781.5,-281.5 CN10.21@1800,-300
NetCN10_23: CN10.23 SB15.2 SB175.2 | length 272.8
  Top Layer w5: SB15.2@1653.75,-450 1655.75,-452 1756.28,-452 1800,-408.28 CN10.23@1800,-400
  Bottom Layer w5: 1701,-399.25 1799.25,-399.25 CN10.23@1800,-400
NetCN10_29: CN10.29 SB179.2 | length 131.7
  Bottom Layer w5: SB179.2@1680.75,-670 1719,-670 1749,-700 CN10.29@1800,-700
NetCN11_25: CN11.25 SB144.2 | length 1819.5
  Signal w5: CN11.25@-300,600 -248,652 -248,832.03 -223,857.03 -176.38,857.03 ; -176.35,857 -23.65,857 ; -23.62,857.03 23.62,857.03 ; 23.65,857 76.35,857 ; 76.38,857.03 123.62,857.03 ; 123.65,857 531.21,857 553.21,879 688,879 v1(786.68,780.32)
  Bottom Layer w5: SB144.2@716,338.75 716,363.13 763.5,410.63 763.5,757.15 v1(786.68,780.32)
NetCN11_27: CN11.27 SB145.2 | length 1819.8
  Signal w5: CN11.27@-300,500 -250,550 -179,550 -149,580 -149,784 -91,842 -17.44,842 ; -17.41,842.03 17.41,842.03 ; 17.44,842 82.56,842 ; 82.59,842.03 117.41,842.03 ; 117.44,842 537.43,842 559.43,864 669,864 v1(789,744)
  Bottom Layer w5: SB145.2@775,339 778.5,342.5 778.5,733.5 v1(789,744)
NetCN11_29: CN11.29 SB148.2 | length 1864.5
  Signal w5: CN11.29@-300,400 -254,446 -187,446 -114,519 -114,699 -70.97,742.03 117.41,742.03 ; 117.44,742 169,742 221.2,794.2 673.8,794.2 v2(804,664)
  Bottom Layer w5: v2(804,664) 820,648 820,488.5 969.75,338.75 SB148.2@1013.7,338.75
NetCN11_31: CN11.31 SB163.2 | length 2302.2
  Signal w5: CN11.31@-300,300 -354.83,245.17 -354.83,-321.17 -322,-354 727.12,-354 v2(727.62,-354.5)
  Bottom Layer w5: v2(727.62,-354.5) 727.62,-312.38 749,-291 813,-291 841,-263 841,-68 878,-31 966,-31 999.25,2.25 SB163.2@1003,2.25
NetCN11_69: CN11.69 SB4.2 | length 4469.8
  Top Layer w5: v1(-381,1094) -389.73,1085.27 -389.73,-1510.27 CN11.69@-300,-1600 ; v2@993,1437 1066,1437 1082,1421 SB4.2@1082,1400
  Bottom Layer w5: v1(-381,1094) -332.97,1142.03 133.03,1142.03 209,1218 209,1369 294.5,1454.5 973.5,1454.5 v2(992,1436)
NetCN12_1: CN12.1 SB117.2 | length 1527.8
  Signal w5: v2(896.7,1351) 921.7,1376 1151,1376 1261,1486 1630,1486 1720,1576 1720,1673 1762,1715 1947,1715 2031,1799 CN12.1@2100,1799 CN12.1@2092,1807
  Bottom Layer w5: SB117.2@834.75,1351 843.69,1359.94 887.76,1359.94 v2(896.7,1351) ; CN12.1@2098.97,1800.03 CN12.1@2100,1799
NetCN12_2: CN12.2 SB116.2 | length 1629.1
  Signal w5: v2(963,1354.25) 1149.25,1354.25 1267.1,1472.1 1365.76,1472.1 1635.76,1472.1 1712.9,1549.24 1733.9,1570.24 1733.9,1570.9 1734,1571 1734,1667.34 1767.66,1701 2000,1701 2047,1748 2149,1748 CN12.2@2200,1799
  Bottom Layer w5: SB116.2@835,1410 907.25,1410 v2(963,1354.25)
NetCN12_10: CN12.10 SB7.1 | length 1051.4
  Top Layer w5: SB7.1@1259,1400 v1(1259,1432.25)
  Signal w5: v1(1259,1432.25) 1283.75,1457 1645,1457 1698,1510 1973,1510 2035,1448 2151,1448 CN12.10@2200,1399
NetCN13_2: CN13.2 D6.4 SB133.1 | length 3070.8
  Top Layer w6.1: v2(416.75,-1831) 412.3,-1835.45 412.3,-1947 ; CN13.2@417.59,-2037 417.59,-2007.15 412.3,-2001.85 412.3,-1947 ; D6.4@451.24,-1946.4 412.89,-1946.4 412.3,-1947
  Bottom Layer w6.1: v2(416.75,-1831) 412.3,-1826.55 412.3,-1723.7 439,-1697 439,-1512.21 612,-1339.21 612,335.57 705.78,429.36 705.78,835.78 SB133.1@728,858
NetCN13_3: CN13.3 D6.3 R70.1 SB132.1 | length 3198.1
  Top Layer w6.1: R70.1@236,-1946.5 236.09,-1946.4 D6.3@356.76,-1946.4 396.89,-1946.4 397.3,-1946 ; CN13.3@392,-2037 392,-2007.15 397.3,-2001.85 397.3,-1946 ; v2(392.85,-1831) 397.3,-1835.45 397.3,-1946
  Bottom Layer w6.1: v2(392.85,-1831) 397.3,-1826.55 397.3,-1717.49 424,-1690.79 424,-1506 597,-1333 597,341.79 690.78,435.57 690.78,835.78 SB132.1@668.57,858 SB132.1@665.06,861.5
NetCN13_4: CN13.4 D6.1 SB125.1 | length 3971
  Top Layer w5: v2(301,-1872) 301.4,-1871.6 D6.1@356.76,-1871.6 ; CN13.4@366.41,-2037 366.41,-1991.59 v2(367,-1991)
  Bottom Layer w5: v2(301,-1872) 302.73,-1872 367,-1936.27 v2(367,-1991) ; v2@301.69,-1871.31 301.69,-804.31 409,-697 409,-12.71 376.62,19.67 312,19.67 237.1,94.57 237.1,1021.1 303.5,1087.5 303.5,1253.5 348,1298 559,1298 628.42,1228.58 SB125.1@628.42,1197.75 SB125.1@628.42,1185
NetCN14_1: CN14.1 U11.16 | length 404.7
  Top Layer w5.1: U11.16@1372,-1475.56 1372,-1506.15 1329.5,-1548.65 1329.5,-1554.86 1335.14,-1560.5 1433.93,-1560.5 1484,-1610.57 1484,-1675.09 1459.55,-1699.54 CN14.1@1459.55,-1730.67
NetCN14_2: CN14.2 U11.14 | length 389.2
  Top Layer w5.1: U11.14@1272,-1475.56 1272,-1506.15 1314.5,-1548.65 1314.5,-1561.08 1328.92,-1575.5 1427.71,-1575.5 1468,-1615.79 1468,-1669.88 1450.52,-1687.36 CN14.2@1419.39,-1687.36
NetCN14_3: CN14.3 U11.11 | length 552.2
  Top Layer w5.1: U11.11@1122,-1475.56 1122,-1506.15 1079.5,-1548.65 1079.5,-1582 1100.5,-1603 1307.41,-1603 1322.31,-1603 1363.21,-1603 1381,-1620.79 1381,-1728.91 CN14.3@1379.24,-1730.67
NetCN14_4: CN14.4 CN14.5 R54.2 | length 734.5
  Top Layer w5: R54.2@781,-1485.5 781,-1519 931,-1669 1088,-1669 1192.5,-1773.5 1256.09,-1773.5 CN14.5@1298.92,-1730.67 1339.08,-1690.51 CN14.4@1339.08,-1687.36
NetCN14_6: CN14.6 U11.9 | length 587.1
  Top Layer w5.1: U11.9@1022,-1475.56 1022,-1506.15 1064.5,-1548.65 1064.5,-1588.21 1094.29,-1618 1100.5,-1618 1132.79,-1618 1357,-1618 1366,-1627 1366,-1639 1350.94,-1654.06 1292.06,-1654.06 CN14.6@1258.76,-1687.36
NetCN14_7: CN14.7 CN14.8 R55.2 | length 502.1
  Top Layer w5: R55.2@840.33,-1485.5 840.33,-1520.33 963.37,-1643.37 1134.46,-1643.37 CN14.8@1178.45,-1687.36 1218.61,-1727.52 CN14.7@1218.61,-1730.67
NetCN14_9: CN14.9 R67.1 | length 92.2
  Top Layer w10: CN14.9@1596.95,-1773.19 1597.26,-1773.5 R67.1@1689,-1773.5
NetCN14_10: CN14.10 U9.3 | length 1484.4
  Top Layer w5: U9.3@1024.8,-684.16 1063.16,-684.16 1087,-708 1179,-708 1196,-725 1196,-863.53 v2(1220,-887.53)
  Bottom Layer w5: v2(1220,-887.53) 1264.47,-932 1428.3,-932 1535,-1038.7 1535,-1744.98 CN14.10@1506.8,-1773.19
NetCN14_11: CN14.11 R65.1 | length 287.7
  Top Layer w5: R65.1@886,-1773.5 886,-1797 897,-1808 1061.56,-1808 1096.38,-1773.19 CN14.11@1131.2,-1773.19
NetCN14_12: CN14.12 R66.1 U9.2 | length 1644.8
  Top Layer w5: R66.1@944.68,-1773.5 944.99,-1773.19 CN14.12@1041.05,-1773.19 1040.74,-1773.5 R66.1@953.01,-1773.5 ; U9.2@1024.8,-703.84 v2(1052,-703.84)
  Bottom Layer w5: CN14.12@1041.05,-1773.19 870,-1602.14 870,-1157.58 807,-1094.58 807,-719 831,-695 880,-695 908,-667 1015.16,-667 v2(1052,-703.84)
NetD1_2: D1.2 R1.1 | length 71.1
  Top Layer w5: D1.2@81.24,2830 81.5,2829.75 R1.1@81.5,2759
NetD2_2: D2.2 R8.1 | length 187.1
  Top Layer w10: R8.1@1078,2747.5 v2(1078,2784) ; D2.2@1147,2785.24 v1@1185.61,2785.24
  Bottom Layer w5: v1@1184.43,2787.94 v1(1186.37,2786)
  Bottom Layer w10: v2(1078,2784) 1184.37,2784 v1(1186.37,2786)
NetJP1_2: JP1.2 R7.1 R8.2 U2.39 | length 499.4
  Top Layer w5: JP1.2@1000,2920 1089,2920 1118.46,2890.54 1118.46,2691 1111.96,2684.5 R8.2@1078,2684.5 ; U2.39@1018.9,2617.27 U2.39@1018.9,2617.32 R7.1@1018.9,2684.34 ; R7.1@1019,2684.45 R8.2@1078,2684.45
NetJP2_2: JP2.2 R18.2 U2.21 | length 1647
  Top Layer w5: JP2.2@-300,2300 JP2.2@-300,2300 R18.2@-300,2414.45 ; v2(973.62,2143) 973.62,2220.62 999.21,2246.21 U2.21@999.21,2282.68
  Bottom Layer w5: JP2.2@-301,2301 -245,2301 -208,2264 -208,2192 -159,2143 v2(973.62,2143)
NetJP4_1: JP4.1 SB184.1 SB185.2 | length 5589.1
  Bottom Layer w5: JP4.1@600,1500 288,1500 192,1404 192,1222.02 127.95,1157.97 -355.03,1157.97 -411.9,1101.1 -411.9,-1757.1 -93,-2076 512,-2076 529,-2059 529,-1811 553.31,-1786.69 SB184.1@579,-1786.69 579.06,-1786.75 SB185.2@638,-1786.75
NetJP7_1: JP7.1 U9.18 | length 568.1
  Top Layer w5: v1(849,-725) 849,-723.53 U9.18@875.2,-723.53
  Bottom Layer w5: v1(849,-725) 886.5,-762.5 1188.49,-762.5 1209,-783 1209,-827.47 1235.53,-854 JP7.1@1309.94,-854
NetL1_2: L1.2 SB12.1 | length 60
  Top Layer w20: L1.2@1382,-325.5 1435.2,-325.5 SB12.1@1440,-330.3
NetLD1_1: LD1.1 R32.2 | length 71
  Top Layer w5: R32.2@1004,1855.5 LD1.1@1004,1926.54
NetLD2_1: LD2.1 R31.2 | length 70.7
  Top Layer w5: LD2.1@877.76,1926.07 878,1925.83 R31.2@878,1855.5
NetLD3_1: LD3.1 R30.2 | length 71.1
  Top Layer w5: R30.2@750.75,1855.46 LD3.1@750.75,1926.53
NetLD4_2: LD4.2 R17.2 | length 149.7
  Top Layer w5: R17.2@1969,2632.5 1969.53,2633.02 LD4.2@1969.53,2781.94
NetLD4_3: LD4.3 R13.2 | length 149.6
  Top Layer w5: R13.2@1910,2632.5 1910.47,2632.97 LD4.3@1910.47,2781.94
NetLD4_4: LD4.4 R14.1 | length 372.3
  Top Layer w5: LD4.4@1910.47,2900.06 1910.47,2849.53 1921,2839 2016,2839 2029,2826 R14.1@2029,2632.5
NetLD5_1: LD5.1 R21.2 | length 66
  Top Layer w10: LD5.1@2193.5,2294.03 R21.2@2193.5,2360
NetLD5_2: LD5.2 U4.8 | length 98.1
  Top Layer w10: U4.8@2028.47,2284 LD5.2@2126.54,2284
NetLD6_1: LD6.1 R29.1 | length 225
  Top Layer w10: LD6.1@1451.04,1925.86 1505.86,1925.86 1573.5,1993.5 R29.1@1648,1993.5
NetLD7_1: LD7.1 R61.1 | length 69.4
  Top Layer w10: LD7.1@242,-1783.46 243.03,-1784.5 R61.1@311,-1784.5
NetLD7_2: LD7.2 R71.2 SB185.1 U12.3 | length 935.3
  Top Layer w5: LD7.2@242,-1707.53 242,-1669 276.47,-1634.53 511.47,-1634.53 v2(512,-1634) ; v2(822.4,-1914) U12.3@822.4,-1945.15 822,-1945.55 885.95,-1945.55 R71.2@886,-1945.5
  Bottom Layer w5: v2(512,-1634) 617,-1634 638,-1655 SB185.1@638,-1719.25 717.25,-1719.25 737,-1739 737,-1828.6 v2(822.4,-1914)
NetLD8_1: LD8.1 R64.1 | length 64
  Top Layer w10: LD8.1@719.01,-1773.47 R64.1@782.97,-1773.47
NetLD8_2: LD8.2 T2.3 | length 101.3
  Top Layer w10: T2.3@619.01,-1709.63 622.1,-1706.54 LD8.2@719.01,-1706.54
NetR3_2: R3.2 U2.3 | length 229.5
  Top Layer w5: R3.2@666,2684.5 666,2608.94 756.04,2518.9 U2.3@782.68,2518.9
NetR4_2: R4.2 U2.2 | length 183.1
  Top Layer w5: R4.2@725,2684.77 R4.2@725,2684.5 725,2574 760.48,2538.53 U2.2@782.68,2538.58
NetR6_2: R6.2 U2.44 | length 83.7
  Top Layer w5: U2.44@920.47,2617.27 920.47,2644.61 R6.2@960.32,2684.45
NetR9_2: R9.2 T1.2 | length 427.9
  Top Layer w5: R9.2@1411,2729.5 v2@1411,2763 ; v2(1739.93,2691.63) T1.2@1774.58,2691.63
  Bottom Layer w5: v2(1411,2766) 1665.56,2766 v2(1739.93,2691.63)
NetR12_1: R12.1 R15.1 R16.2 T1.1 | length 176.9
  Top Layer w5: T1.1@1697.7,2691.35 R15.1@1697.7,2632.5 R12.1@1815.7,2632.5
NetR20_1: R20.1 U2.29 | length 90.8
  Top Layer w5: U2.29@1117.32,2420.47 R20.1@1208.09,2420.41
NetR27_2: R27.2 U2.28 U4.3 | length 1130.3
  Top Layer w5: U2.28@1117.32,2400.79 1153.11,2400.79 1170.53,2383.37 1170.53,2192.97 1233.5,2130 1632.5,2130 v2(1652,2149.5) R27.2@1652,2186 ; U4.3@1837.53,2184 v1(1903,2184)
  Bottom Layer w5: v2@1655,2150.6 1869.6,2150.6 v1(1903,2184)
NetR28_2: R28.2 U4.5 | length 92.8
  Top Layer w10: U4.5@2028.47,2134 R28.2@2121.31,2134
NetR30_1: R30.1 SB118.2 | length 1127.5
  Top Layer w5: v2(702.94,1792.47) R30.1@750.75,1792.47
  Signal w5: v2(702.94,1792.47) 809,1686.41 809,1364 855,1318 1204,1318 v1(1318,1432)
  Bottom Layer w5: SB118.2@1318,1400 v1(1318,1432)
NetR31_1: R31.1 SB139.2 | length 1848.6
  Top Layer w5: v2@832.03,1792.5 R31.1@878,1792.5 R31.1@888.5,1792.5
  Signal w5: v2(425,975.63) 516,1066.63 516,1699 662,1845 779.47,1845 v2(832,1792.47)
  Bottom Layer w5: SB139.2@368.5,427 344.75,427 312,459.75 312,722 368.5,778.5 368.5,919.13 v2(425,975.63)
NetR32_1: R32.1 U7.3 U7.4 | length 1205
  Top Layer w5: R32.1@1006,1792.5 1038.5,1792.5 1135.5,1889.5 1613.5,1889.5 1704,1799 1704,1600 1663.15,1559.15 U7.4@1596.9,1559.15 U7.3@1596.9,1452.85
NetR33_1: R33.1 R34.1 U7.1 | length 143.4
  Top Layer w5: U7.1@1522.09,1452.85 1522.09,1397.59 R33.1@1522,1397.5 R34.1@1610,1397.5
NetR34_2: R34.2 SB119.1 SB120.2 | length 132.5
  Top Layer w5: v2(1569,1334.5) R34.2@1610,1334.5
  Bottom Layer w5: SB119.1@1522,1332.5 1611,1332.5 SB120.2@1612.75,1334.25
NetR35_2: R35.2 SB127.1 | length 138
  Top Layer w5: R35.2@747,1182.5 R35.2@747.25,1182.75 ; R35.2@747,1195.5 747,1232 758,1243 v2(788.66,1243)
  Bottom Layer w5: v2(788.66,1243) 789,1243 806,1226 SB127.1@806,1197.75 SB127.1@806,1195.5
NetR39_2: R39.2 R40.1 U9.11 | length 274.4
  Top Layer w5: R39.2@736,-478.5 R40.1@796.01,-478.5 ; R40.1@796.01,-469.5 R40.1@796.01,-478.5 ; U9.11@920.47,-599.51 920.47,-569.47 866.81,-515.81 810.81,-515.81 796.01,-501.01 R40.1@796.01,-478.5
NetR41_1: R41.1 U9.10 | length 165.3
  Top Layer w5: R41.1@855,-469.5 R41.1@855,-478.5 940.16,-563.65 U9.10@940.16,-599.51
NetR42_1: R42.1 R43.2 U9.8 | length 180
  Top Layer w5: R42.1@973,-478.5 R42.1@979.53,-478.5 ; U9.8@979.53,-599.51 R42.1@979.53,-478.5 ; R43.2@1032,-478.5 R42.1@979.53,-478.5
NetR42_2: R42.2 SB178.1 | length 802.8
  Top Layer w5: R42.2@973,-415.5 v1@973,-370.01
  Bottom Layer w5: v1@973,-370.01 1102.99,-500 1391.47,-500 1488.47,-597 1636.25,-597
  other v1: 974,-369.63
NetR44_2: R44.2 R45.1 U9.7 | length 218.7
  Top Layer w5: U9.7@999.21,-599.51 999.21,-569.21 1089.93,-478.5 R44.2@1091,-478.5 R45.1@1150,-478.5
NetR45_2: R45.2 SB181.1 | length 770.8
  Top Layer w5: R45.2@1150,-415.5 1193.5,-415.5 1280,-502 1506,-502 1568,-564 1568,-750 v2(1614,-796)
  Bottom Layer w5: v2@1613.25,-795.23 SB181.1@1613.25,-755
NetR46_1: R46.1 SB160.1 U9.12 | length 873.1
  Top Layer w5: R46.1@796.5,-548 v1(832,-548) 877,-548 900.79,-571.79 U9.12@900.79,-599.51
  Bottom Layer w5: v1(832,-548) 856,-524 856,-79 889,-46 1038.7,-46 1062,-22.7 SB160.1@1062,0.25
NetR47_2: R47.2 R48.1 U9.14 | length 147.2
  Top Layer w5: R47.2@796.5,-607 R48.1@796.5,-666 818.01,-666 840.04,-643.97 874.38,-643.97 U9.14@875.2,-644.79
NetR48_2: R48.2 SB13.1 | length 2401.9
  Top Layer w5: SB13.1@325.75,-359 363.5,-359 390,-332.5 390,-269 422,-237 632,-237 646,-251 646,-277 636,-287 457,-287 446,-298 446,-322 456.5,-332.5 636.6,-332.5 648,-343.9 648,-378.1 636.6,-389.5 459.4,-389.5 448,-400.9 448,-435.1 459.4,-446.5 636.6,-446.5 648,-457.9 648,-492.1 636.6,-503.5 459.4,-503.5 448,-514.9 448,-549.1 459.4,-560.5 629.5,-560.5 645,-576 645,-605 634,-616 462.1,-616 452,-626.1 452,-654 464,-666 R48.2@733.5,-666
NetR49_1: R49.1 U9.24 | length 108.2
  Top Layer w5: U9.24@999.21,-749.12 999.21,-765.21 1035,-801 R49.1@1076.5,-801
NetR56_2: R56.2 U11.10 | length 219.9
  Top Layer w5: R56.2@899,-1422.5 1061.5,-1422.5 1072,-1433 U11.10@1072,-1475.56
NetR57_2: R57.2 U11.15 | length 223
  Top Layer w5: U11.15@1322,-1475.56 1322,-1438 1337.5,-1422.5 R57.2@1501,-1422.5
NetR62_2: R62.2 R63.1 SB184.2 | length 161
  Top Layer w10: R62.2@419,-1721.5 R63.1@478,-1721.5 519.5,-1721.5 v2(520,-1721)
  Bottom Layer w10: v2(520,-1721) 521.81,-1719.19 SB184.2@579,-1719.19
NetR68_2: R68.2 R69.2 T2.1 | length 190.5
  Top Layer w5: T2.1@580.42,-1788.37 580.42,-1869.42 594,-1883 594.5,-1882.5 R69.2@625,-1882.5 R68.2@684,-1882.5
NetR70_2: R70.2 SB186.2 | length 96.8
  Top Layer w5: R70.2@236,-1883.5 v2(236,-1831)
  Bottom Layer w5: v2(236,-1831) SB186.2@236,-1786.69
NetR72_2: R72.2 SB187.2 U12.4 | length 907.2
  Top Layer w5: v2(800,-1839) 800.15,-1838.85 U12.4@822.4,-1838.85 930.92,-1838.85 944.68,-1852.61 R72.2@944.68,-1881.5
  Signal w5: v2(151,-1827) 191.54,-1786.46 747.46,-1786.46 v2(800,-1839)
  Bottom Layer w5: v2(151,-1827) SB187.2@151,-1786.69
NetR73_2: R73.2 SB142.1 SB152.1 | length 118
  Bottom Layer w5: SB152.1@1667.75,314 SB142.1@1667.75,432
NetSB153_1: SB153.1 SB154.1 U8.143 | length 168.4
  Top Layer w7: v1(470,275) U8.143@535.5,275
  Bottom Layer w7: SB153.1@435.69,251.83 458.87,275 v1(470,275)
  Bottom Layer w10: SB154.1@435.69,192.83 SB153.1@435.69,251.83
NetSB155_1: SB155.1 U8.38 | length 168.9
  Top Layer w5: v1@1321,276.3 v1(1322.1,275.2) U8.38@1372.31,275.2
  Bottom Layer w5: SB155.1@1205.75,276 1207.15,274.6 1321.51,274.6 v1(1322.1,275.2)
NetSB161_2: SB161.2 SB166.2 U8.30 | length 447.1
  Top Layer w8: v2(1179.16,109.5) 1180.38,110.71 U8.30@1180.38,181.69
  Bottom Layer w10: v2(1179.16,109.5) 1179.56,109.1 1294.81,109.1 1400.86,3.04 1448.91,3.04 SB161.2@1450,1.95 SB166.2@1509,1.95
NetSB164_1: SB164.1 U9.13 | length 817.2
  Top Layer w5: U9.13@875.2,-625.1 v2(875.2,-598.2)
  Bottom Layer w5: v2(875.2,-598.2) 875.2,-122.8 937,-61 1087.16,-61 1121.53,-26.62 SB164.1@1121.53,2.06
NetSB177_2: SB177.2 U9.15 | length 85.8
  Top Layer w5: v1(848.53,-664.47) U9.15@875.2,-664.47
  Bottom Layer w5: SB177.2@798.75,-642 826.06,-642 v1(848.53,-664.47)
NetSB182_2: SB182.2 U9.17 | length 2673.1
  Top Layer w5: v2(62,-1500) 80.5,-1481.5 80.5,-1437 93.5,-1424 132.5,-1424 145.5,-1437 145.5,-1563 158.5,-1576 197.5,-1576 210.5,-1563 210.5,-1437 223.5,-1424 262.5,-1424 275.5,-1437 275.5,-1563 288.5,-1576 327.5,-1576 340.5,-1563 340.5,-1437 353.5,-1424 392.5,-1424 405.5,-1437 405.5,-1489 416.5,-1500 559.71,-1500 669,-1390.71 669,-1064 652,-1047 486,-1047 401.5,-962.5 401.5,-790.19 452.85,-738.84 799.95,-738.84 834.95,-703.84 U9.17@875.2,-703.84
  Bottom Layer w5: SB182.2@25.75,-1500 v2(62,-1500)
NetSB183_2: SB183.2 U9.16 | length 2583.8
  Top Layer w5: v2(22,-1563) 22,-1413 52,-1383 432,-1383 452.85,-1403.85 560.15,-1403.85 582,-1382 582,-1342 563.5,-1323.5 467,-1323.5 454,-1310.5 454,-1271.5 467,-1258.5 593,-1258.5 606,-1245.5 606,-1206.5 593,-1193.5 467,-1193.5 454,-1180.5 454,-1141.5 467,-1128.5 593,-1128.5 606,-1115.5 606,-1076.5 593,-1063.5 481.29,-1063.5 386.5,-968.71 386.5,-782.5 445.16,-723.84 793.73,-723.84 832.6,-684.97 874.38,-684.97 U9.16@875.2,-684.16
  Bottom Layer w5: v2(22,-1563) 22,-1596.25 SB183.2@25.75,-1600